# Altium PCB PCB1.PcbDoc
Units mil, origin at the board's own origin, x right, y up, seen from the top; angles counter-clockwise.
Board outline 6150 x 5015 mil, 2 copper layers (Top Layer, Bottom Layer); 46 components, 60 nets, 245 pads, 29 vias.
Unrouted connection lines stored in the file: 1.
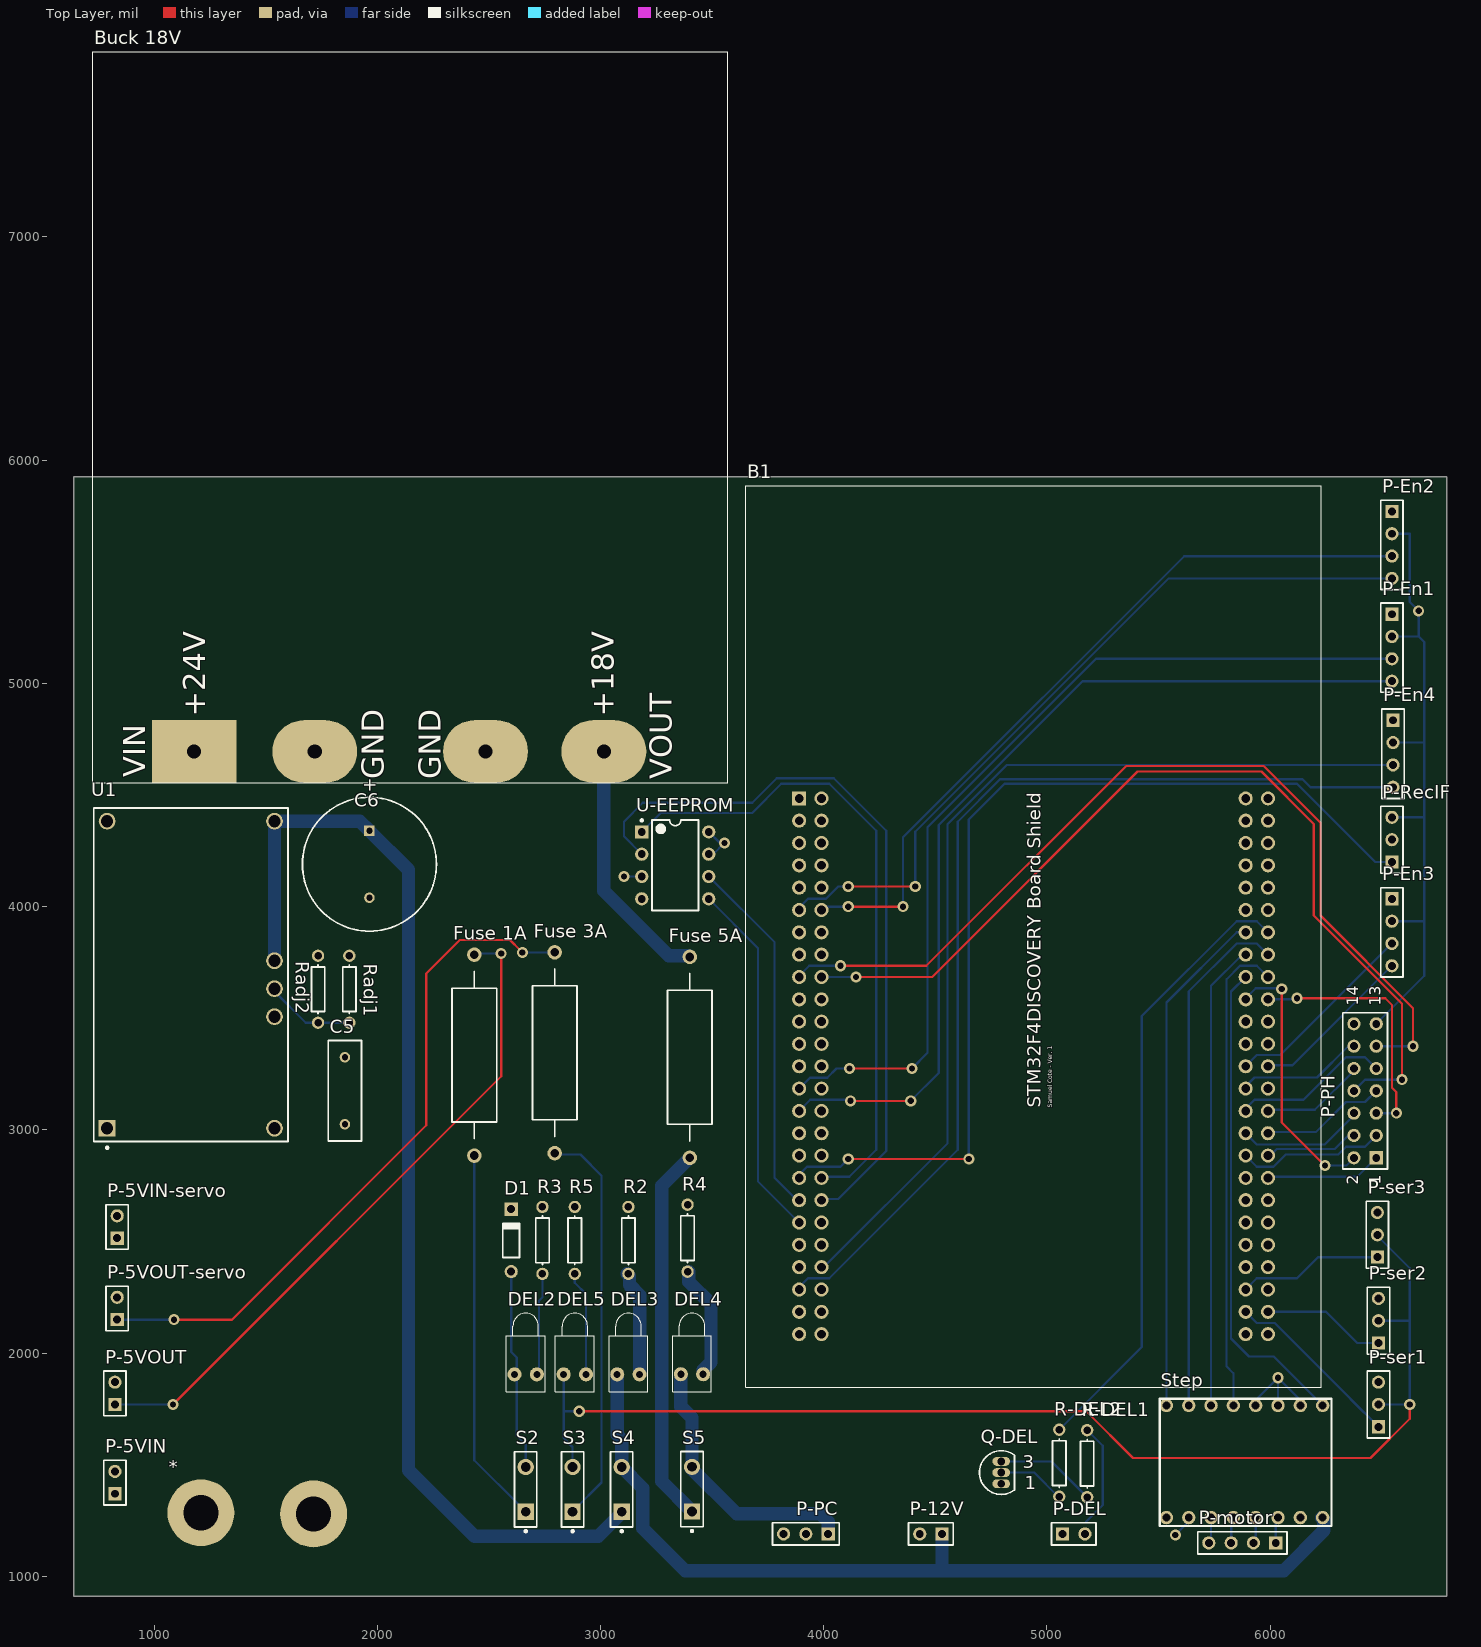
[diagram p0: Top Layer view]
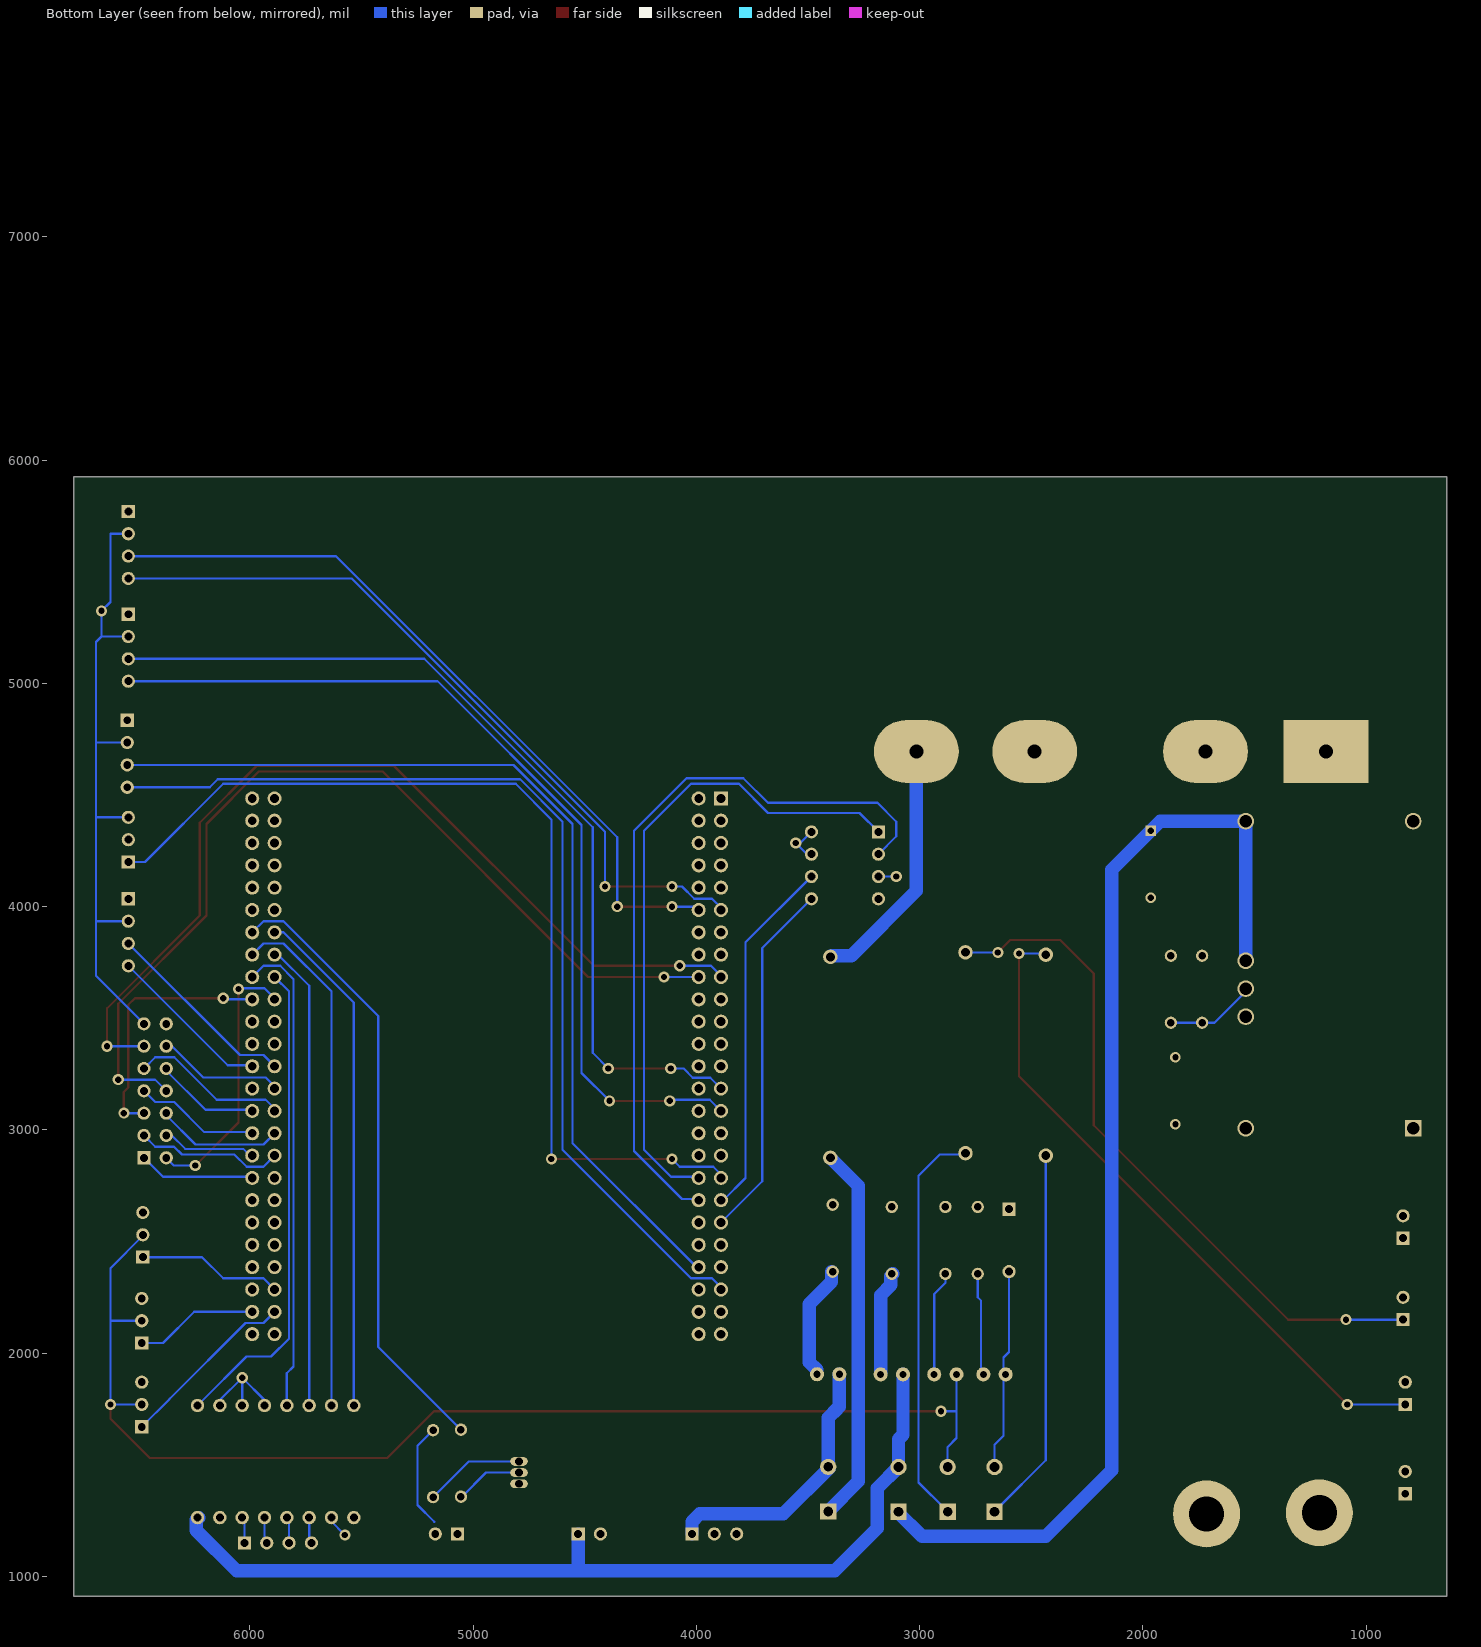
[diagram p1: Bottom Layer view, seen from below]

## Layer stack, top to bottom
Top Solder: solder mask 0.4, Solder Resist, Dk 3.5
Top Layer: signal copper 1.4
Dielectric 1: dielectric 12.6, FR-4, Dk 4.8
Bottom Layer: signal copper 1.4
Bottom Solder: solder mask 0.4, Solder Resist, Dk 3.5

## Board outline
640,910 6790,910 6790,5925 640,5925

## Design rules (kind name [scope] priority, off if disabled: settings)
Clearance [All] p1: gap=10
PolygonConnect [All] p1: connectstyle=Relief reliefconductorwidth=10 reliefentries=4 polygonreliefangle="90 Angle" airgapwidth=10
RoutingVias [All] p1: holewidth=28 width=50 viastyle="Through Hole" minholewidth=28 minwidth=50 maxholewidth=28 maxwidth=50
SolderMaskExpansion [All] p1: expansion=4
Width [All] p1: maxlimit=60 minlimit=10 preferedwidth=10 minimp=50.000000 maximp=50.000000 favimp=50.000000
30 further rules are at their usual default settings.

## Components (designator, comment, footprint, x,y, rotation, side; value= is the part's Value field where it differs from the comment)
* "BAT" BAT 1210,1284.53 r0 top
B1 "STM32F4" "STM32F4DISCOVERY Board Shield" 3890,4484.53 r0 top
"Buck 18V" "Buck 18V D3 v2" "Buck 18V D3" 1180,4694.53 r90 top
C5 "Cap" RAD-0.3 1855,3175 r90 top
C6 "Cap Pol1" RB7.6-15 1965,4189.53 r90 top
D1 "Diode 1N4148" DO-35 2600,2504.53 r90 top
DEL2 "5V" LED-1 2665,1904.53 r90 top
DEL3 "Reg12V" LED-1 3125,1904.53 r90 top
DEL4 "18V" LED-1 3410,1905 r90 top
DEL5 "5V" LED-1 2885,1904.53 r90 top
"Fuse 1A" "Fuse 5A" AXIAL-0.9 2435,3334.53 r270 top
"Fuse 3A" "Fuse 8A" AXIAL-0.9 2795,3345 r270 top
"Fuse 5A" "Fuse 8A" AXIAL-0.9 3400,3324.53 r270 top
P-5VIN "Header 2" HDR1X2 825,1369.53 r90 top
P-5VIN-servo "Header 2" HDR1X2 835,2514.53 r90 top
P-5VOUT "Header 2" HDR1X2 825,1769.53 r90 top
P-5VOUT-servo "Header 2" HDR1X2 835,2149.53 r90 top
P-12V "Header 2" HDR1X2 4530,1189.53 r180 top
P-DEL "Header 2" HDR1X2 5070,1189.53 r0 top
P-En1 "Header 4" HDR1X4 6545,5309.53 r270 top
P-En2 "Header 4" HDR1X4 6545,5770 r270 top
P-En3 "Header 4" HDR1X4 6545,4034.53 r270 top
P-En4 "Header 4" HDR1X4 6550,4834.53 r270 top
P-motor "Header 4" HDR1X4 6025,1149.53 r180 top
P-PC "Header 3" HDR1X3 4020,1189.53 r180 top
P-PH "Header 7X2" HDR2X7 6475,2874.53 r90 top
P-RecIF "Header 3" HDR1X3 6545,4199.53 r90 top
P-ser1 "Header 3" HDR1X3 6485,1669.53 r90 top
P-ser2 "Header 3" HDR1X3 6485,2044.53 r90 top
P-ser3 "Header 3" HDR1X3 6480,2429.53 r90 top
Q-DEL "2N3904" TO-92A 4795,1464.53 r0 top
R2 "Res1" AXIAL-0.3 3125,2504.53 r90 top
R3 "Res1" AXIAL-0.3 2740,2504.53 r270 top
R4 "Res1" AXIAL-0.3 3390,2514.53 r270 top
R5 "Res1" AXIAL-0.3 2885,2504.53 r90 top
R-DEL1 "Res1" AXIAL-0.3 5180,1504.53 r90 top
R-DEL2 "Res1" AXIAL-0.3 5055,1506.64 r90 top
Radj1 "Res1" AXIAL-0.3 1875,3629.53 r90 top
Radj2 "Res1" AXIAL-0.3 1735,3629.53 r90 top
S2 "SW-SPST" SPST-2 2665,1389.53 r90 top
S3 "SW-SPST" SPST-2 2875,1389.53 r90 top
S4 "SW-SPST" SPST-2 3095,1389.53 r90 top
S5 "SW-SPST" SPST-2 3410,1390 r90 top
Step "Stepper" stepper 6235,1765 r270 top
U1 "PTN78020WAH" TI-EUK7_V 1165,3694.53 r90 top
U-EEPROM "JL411BPA" J08A 3335,4184.53 r0 top

## Footprints (in the part's own frame and the unit in brackets; to place one, negate y for a bottom-side part, rotate by r counter-clockwise, add the part's x,y. Pads: shape width x height; smd on the part's side, far side on the other; paste and mask are expansions set on the pad)
AXIAL-0.3 [mm] "Axial Device, Thru-Hole; 2 Leads; 0.3 in Pin Spacing"
  round 1.4 hole 0.85: 1(-3.81,0) 2(3.81,0)
  silkscreen extent -2.77,-0.76 2.77,0.76
AXIAL-0.9 [mm] "Axial Device, Thru-Hole; 2 Leads; 0.9 in Pin Spacing"
  round 1.65 hole 1: 1(-11.43,0) 2(11.43,0)
  silkscreen extent -9.53,-2.54 9.53,2.54
BAT [mil]
  round 300 hole 157: 1(0,0) 2(505,-5)
"Buck 18V D3" [mil] "Buck 18V D3"
  rect 280x380 hole 63: 1(0,0)
  oval 280x380 hole 63: 2(0,-540) 3(0,-1305) 4(0,-1835)
  silkscreen extent -140,-2390 3135,455, body extent -140,-2390 3135,455, height 525
DO-35 [mm] "Diode, Axial; Body 3.8 x 1.9 mm (LxDia. max), Lead Dia. 0.53 mm (max)"
  round 1.5 hole 0.9: 1(-3.55,0)
  rect 1.5x1.5 hole 0.9: 2(3.55,0)
  silkscreen extent -1.95,-0.95 2.05,0.95
HDR1X2 [mm] "Connector; Header; 2 Position"
  rect 1.5x1.5 hole 0.9: 1(0,0)
  round 1.5 hole 0.9: 2(2.54,0)
  silkscreen extent -1.27,-1.27 3.81,1.27
HDR1X3 [mm] "Connector; Header; 3 Position"
  rect 1.5x1.5 hole 0.9: 1(0,0)
  round 1.5 hole 0.9: 2(2.54,0) 3(5.08,0)
  silkscreen extent -1.27,-1.27 6.35,1.27
HDR1X4 [mm] "Connector; Header; 4 Position"
  rect 1.5x1.5 hole 0.9: 1(0,0)
  round 1.5 hole 0.9: 2(2.54,0) 3(5.08,0) 4(7.62,0)
  silkscreen extent -1.27,-1.27 8.89,1.27
HDR2X7 [mm] "Connector; Header; 7x2 Position"
  rect 1.5x1.5 hole 0.9: 1(0,0)
  round 1.5 hole 0.9: 2(0,2.54) 3(2.54,0) 4(2.54,2.54) 5(5.08,0) 6(5.08,2.54) 7(7.62,0) 8(7.62,2.54) 9(10.16,0) 10(10.16,2.54) 11(12.7,0) 12(12.7,2.54) 13(15.24,0) 14(15.24,2.54)
  silkscreen extent -1.27,-1.27 16.51,3.81
J08A [mm] "DIP, 8-Leads, Row Spacing 7.62mm, Pitch 2.54mm, Body 9.78x6.73mm"
  rect 1.5x1.5 hole 0.9: 1(-3.81,3.81)
  round 1.5 hole 0.9: 2(-3.81,1.27) 3(-3.81,-1.27) 4(-3.81,-3.81) 5(3.81,-3.81) 6(3.81,-1.27) 7(3.81,1.27) 8(3.81,3.81)
  silkscreen extent -3.93,-5.15 2.65,5.23, body extent -3.6,-5.15 3.6,5.15, height 5.08
LED-1 [mm] "LED; 2 Leads"
  round 1.6 hole 0.8: 1(0,1.27) 2(0,-1.27)
  silkscreen extent -2,-2.2 6.95,2.2
RAD-0.3 [mm] "Radial Cap, Thru-Hole; 2 Leads; 0.3 in Pin Spacing"
  round 1.2 hole 0.7: 1(-3.81,0) 2(3.81,0)
  silkscreen extent -5.71,-1.91 5.71,1.91
RB7.6-15 [mm] "Polarized Capacitor (Radial); 2 Leads"
  rect 1.2x1.2 hole 0.7: 1(3.81,0)
  round 1.2 hole 0.7: 2(-3.81,0)
  silkscreen extent -7.62,-7.62 7.62,7.62
SPST-2 [mm] "Switch; 2 Leads"
  rect 1.85x1.85 hole 1.1: 1(-2.54,0)
  round 1.85 hole 1.1: 2(2.54,0)
  silkscreen extent -4.89,-1.27 4.28,1.27
stepper [mil]
  round 60 hole 35.43: 1(0,0) 2(0,-100) 3(0,-200) 4(0,-300) 5(0,-400) 6(0,-500) 7(0,-600) 8(0,-700) 9(502,0) 10(502,-100) 11(502,-200) 12(502,-300) 13(502,-400) 14(502,-500) 15(502,-600) 16(502,-700)
  silkscreen extent -30,-730 540,40
"STM32F4DISCOVERY Board Shield" [mm]
  rect 1.6x1.6 hole 1: 1(0,0)
  round 1.6 hole 1: 2(2.54,0) 3(0,-2.54) 4(2.54,-2.54) 5(0,-5.08) 6(2.54,-5.08) 7(0,-7.62) 8(2.54,-7.62) 9(0,-10.16) 10(2.54,-10.16) 11(0,-12.7) 12(2.54,-12.7) 13(0,-15.24) 14(2.54,-15.24) 15(0,-17.78) 16(2.54,-17.78) 17(0,-20.32) 18(2.54,-20.32) 19(0,-22.86) 20(2.54,-22.86) 21(0,-25.4) 22(2.54,-25.4) 23(0,-27.94) 24(2.54,-27.94) 25(0,-30.48) 26(2.54,-30.48) 27(0,-33.02) 28(2.54,-33.02) 29(0,-35.56) 30(2.54,-35.56) 31(0,-38.1) 32(2.54,-38.1) 33(0,-40.64) 34(2.54,-40.64) 35(0,-43.18) 36(2.54,-43.18) 37(0,-45.72) 38(2.54,-45.72) 39(0,-48.26) 40(2.54,-48.26) 41(0,-50.8) 42(2.54,-50.8) 43(0,-53.34) 44(2.54,-53.34) 45(0,-55.88) 46(2.54,-55.88) 47(0,-58.42) 48(2.54,-58.42) 49(0,-60.96) 50(2.54,-60.96) 51(50.8,0) 52(53.34,0) 53(50.8,-2.54) 54(53.34,-2.54) 55(50.8,-5.08) 56(53.34,-5.08) 57(50.8,-7.62) 58(53.34,-7.62) 59(50.8,-10.16) 60(53.34,-10.16) 61(50.8,-12.7) 62(53.34,-12.7) 63(50.8,-15.24) 64(53.34,-15.24) 65(50.8,-17.78) 66(53.34,-17.78) 67(50.8,-20.32) 68(53.34,-20.32) 69(50.8,-22.86) 70(53.34,-22.86) 71(50.8,-25.4) 72(53.34,-25.4) 73(50.8,-27.94) 74(53.34,-27.94) 75(50.8,-30.48) 76(53.34,-30.48) 77(50.8,-33.02) 78(53.34,-33.02) 79(50.8,-35.56) 80(53.34,-35.56) 81(50.8,-38.1) 82(53.34,-38.1) 83(50.8,-40.64) 84(53.34,-40.64) 85(50.8,-43.18) 86(53.34,-43.18) 87(50.8,-45.72) 88(53.34,-45.72) 89(50.8,-48.26) 90(53.34,-48.26) 91(50.8,-50.8) 92(53.34,-50.8) 93(50.8,-53.34) 94(53.34,-53.34) 95(50.8,-55.88) 96(53.34,-55.88) 97(50.8,-58.42) 98(53.34,-58.42) 99(50.8,-60.96) 100(53.34,-60.96)
  silkscreen extent -6.1,-67 59.42,35.59, body extent -6.09,-66.99 59.41,35.58, height 27.2
TI-EUK7_V [mm] "Module, 7-Leads, Body 37.97x22.1mm"
  rect 1.9x1.9 hole 1.4: 1(-17.465,9.53)
  round 1.9 hole 1.4: 2(-17.465,-9.52) 3(-4.765,-9.52) 4(-1.585,-9.52) 5(1.595,-9.52) 6(17.475,-9.52) 7(17.475,9.53)
  silkscreen extent -19.81,-11.05 18.98,11.05, body extent -18.98,-11.05 18.98,11.05, height 9
TO-92A [mm] "TO, Flat Index; 3 In-Line, Axial Leads; Body Dia. 4.5mm; Leads 0.51 x 0.48 mm (max)"
  oval 2x1 hole 0.9: 1(0,-1.27) 2(0,0) 3(0,1.27)
  silkscreen extent -2.48,-2.48 1.5,2.48

## Part data
B1: library part "STM32F4DISCOVERY Board Shield", "STM32F4DISCOVERY Board Shield"
C5: "Capacitor"
C6: "Polarized Capacitor (Radial)"
D1: "High Conductance Fast Diode"
DEL2 DEL3 DEL4 DEL5: library part LED0, "Typical INFRARED GaAs LED"
"Fuse 1A" "Fuse 3A" "Fuse 5A": library part "Fuse 1", "Fuse"
P-5VIN P-5VIN-servo P-5VOUT P-5VOUT-servo P-12V P-DEL: "Header, 2-Pin"
P-En1 P-En2 P-En3 P-En4 P-motor: "Header, 4-Pin"
P-PC P-RecIF P-ser1 P-ser2 P-ser3: "Header, 3-Pin"
P-PH: "Header, 7-Pin, Dual row"
Q-DEL: "NPN General Purpose Amplifier"
R2 R3 R4 R5 R-DEL1 R-DEL2 Radj1 Radj2: "Resistor"
S2 S3 S4 S5: "Single-Pole, Single-Throw Switch"
U1: "6 A Wide-Input Voltage Adjustable Switching Regulator, -40 to 85 degC, 7-pin Module (EUK7), Pb-Free (RoHS)"
U-EEPROM: "Low Offset, Low Drift JFET Input Operational Amplifier"

## Via types
v1: diameter 50, hole 28, Top Layer to Bottom Layer, 29 vias

## Nets (pads, with @x,y where several pads share a name; then routed paths per layer and width w, separated by ;. In a path a pad name is that pad's centre, name@x,y a point inside that pad or via, vN(x,y) a via of type N, cw(c..) or ccw(c..) an arc to the next point about the centre after c; other vN are vias at no path point)
GND: "Buck 18V.2" "Buck 18V.3" *.2 B1.1 B1.2 B1.49 B1.50 B1.51 B1.52 B1.99 B1.100 C5.1 C6.2 P-5VIN-servo.2 P-5VIN.2 P-5VOUT-servo.2 P-5VOUT.2 P-12V.2 P-En1.1 P-En2.1 P-En3.1 P-En4.1 P-PC.3 P-PH.14 P-RecIF.2 P-ser1.3 P-ser2.3 P-ser3.3 Q-DEL.1 R2.2 R3.1 R4.1 R5.2 Radj1.2 Radj2.2 Step.10 Step.16 U1.1 U1.7 U-EEPROM.4
Net*_1: "Buck 18V.1" *.1 C5.2 P-5VIN-servo.1 P-5VIN.1 U1.2
"NetBuck 18V_4": "Buck 18V.4" "Fuse 5A.1" | length 1124.8
  Bottom Layer w60: 3015,4694.53 3015,4070 3305.47,3779.53 3395,3779.53
NetC6_1: C6.1 S4.1 U1.5 U1.6 | length 5125.5
  Bottom Layer w60: U1.5 1539.8,3869.53 ; 1539.8,3874.33 U1.6 1922.01,4382.52 C6.1@1962.99,4341.54 ; C6.1 2140,4164.53 2140,1475 2435.47,1179.53 2990,1179.53 S4.1@3100,1289.53
NetD1_1: D1.1 DEL2.1 S2.2 | length 882.2
  Bottom Layer w10: D1.1 2600,2004.53 2625,1979.53 2625,1904.53 2625,1629.53 2665,1589.53 S2.2@2665,1509.53
NetDEL2_2: DEL2.2 R3.2 | length 451.2
  Bottom Layer w10: DEL2.2@2725,1904.53 2725,2234.53 2740,2249.53 R3.2@2740,2349.53
NetDEL3_2: DEL3.2 R2.1 | length 462.8
  Bottom Layer w60: R2.1@3120,2354.53 3130,2344.53 3130,2304.53 3175,2259.53 DEL3.2@3175,1914.53
NetDEL4_1: DEL4.1 P-PC.1 S5.2 | length 1200.6
  Bottom Layer w40: S5.2@3405,1485 S5.2
  Bottom Layer w60: 3360,1760 DEL4.1 ; 3368.5,1751.5 3410,1710 S5.2 ; S5.2@3405,1485 3610.47,1279.53 3985.47,1279.53 4020,1245 P-PC.1
NetDEL4_2: DEL4.2 R4.2 | length 515.4
  Bottom Layer w10: DEL4.2 DEL4.2@3460,1924.53
  Bottom Layer w60: R4.2@3395,2364.53 3395,2319.53 3495,2219.53 3495,1959.53 DEL4.2@3460,1924.53
NetDEL5_2: DEL5.2 R5.1 | length 470.7
  Bottom Layer w10: R5.1 2885,2314.53 2935,2264.53 DEL5.2
"NetFuse 1A_1": "Fuse 1A.1" P-5VOUT.1 | length 2993.9
  Top Layer w10: v1(1085,1769.53) 2555,3239.53 v1@2555,3774.53
  Bottom Layer w10: P-5VOUT.1 v1(1085,1769.53) ; 2435,3789.53 v1(2555,3789.53)
"NetFuse 1A_2": "Fuse 1A.2" S2.1 | length 1710.3
  Bottom Layer w10: 2435,2884.53 2435,1520 2645,1310 2645,1289.53 S2.1@2665,1309.53
"NetFuse 3A_1": "Fuse 3A.1" P-5VOUT-servo.1 | length 3056.5
  Top Layer w10: v1(1090,2149.53) 1349.53,2149.53 2220,3020 2220,3700 2370,3850 2594.53,3850 v1@2640,3804.53
  Bottom Layer w10: P-5VOUT-servo.1 v1(1090,2149.53) ; v1(2650,3794.53) 2780,3794.53
"NetFuse 3A_2": "Fuse 3A.2" S3.1 | length 1828.2
  Bottom Layer w10: 2785,2889.53 2910,2889.53 3005,2794.53 3005,1420 2885,1300 2885,1289.53 S3.1@2875,1299.53
"NetFuse 5A_2": "Fuse 5A.2" S5.1 | length 1692.2
  Bottom Layer w60: 3400,2874.53 3275,2749.53 3275,1425 S5.1
NetP-DEL_2: P-DEL.2 R-DEL1.2 | length 470.1
  Bottom Layer w10: 5175,1244.53 5250,1319.53 5250,1584.53 R-DEL1.2
NetP-motor_1: P-motor.1 Step.11 | length 118
  Bottom Layer w10: P-motor.1 Step.11@6025,1267.53
NetP-motor_2: P-motor.2 Step.12 | length 132.1
  Bottom Layer w10: P-motor.2 5935,1159.53 Step.12@5935,1277.53
NetP-motor_3: P-motor.3 Step.13 | length 118
  Bottom Layer w10: P-motor.3 Step.13@5825,1267.53
NetP-motor_4: P-motor.4 Step.14 | length 132.1
  Bottom Layer w10: P-motor.4 5735,1159.53 Step.14@5735,1277.53
NetQ-DEL_2: Q-DEL.2 R-DEL2.1 | length 303.4
  Bottom Layer w10: Q-DEL.2 4942.88,1464.53 R-DEL2.1@5052.88,1354.53
NetQ-DEL_3: Q-DEL.3 R-DEL1.1 | length 437.1
  Bottom Layer w10: Q-DEL.3 5020,1514.53 R-DEL1.1@5170,1364.53
NetRadj1_1: Radj1.1 Radj2.1 U1.4 | length 405.7
  Bottom Layer w10: U1.4 1539.8,3619.72 1680,3479.53 Radj2.1 Radj1.1
PA0: B1.12 P-En2.3 | length 3387.2
  Top Layer w10: v1(4110,3999.53) v1(4355,3999.53)
  Bottom Layer w10: B1.12@3995,3999.53 v1(4110,3999.53) ; v1(4355,3999.53) 4355,4310 5614.53,5569.53 P-En2.3@6550,5569.53
PA1: B1.11 P-En2.4 | length 3417
  Top Layer w10: v1(4110,4089.53) v1(4410,4089.53)
  Bottom Layer w10: B1.11@3885,3989.53 3930,4034.53 4010,4034.53 4065,4089.53 v1(4110,4089.53) ; v1(4410,4089.53) 4410,4335 5545,5470 P-En2.4
PA6: B1.18 P-PH.8 | length 4235.1
  Top Layer w10: v1(4145,3684.53) 4485.59,3684.53 5405.59,4604.53 5960.47,4604.53 6195,4370 6195,3959.53 6590,3564.53 v1(6590,3224.53)
  Bottom Layer w10: B1.18@3985,3689.53 B1.18 v1(4145,3684.53) ; P-PH.8 6425,3224.53 v1(6590,3224.53)
PA7: B1.17 P-PH.11 | length 4180.2
  Top Layer w10: v1(4075,3734.53) 4459.53,3734.53 5354.53,4629.53 5970.47,4629.53 6225,4375 6225,3960 6640,3545 v1(6640,3374.53)
  Bottom Layer w10: B1.17 3890,3689.53 3935,3734.53 v1(4075,3734.53) ; B1.17@3909.24,3689.53 B1.17@3912.24,3689.53 ; P-PH.11@6475,3379.53 P-PH.11 v1(6640,3374.53)
PB4: B1.75 P-En3.3 | length 882.8
  Bottom Layer w10: B1.75 5940,3334.53 6045,3334.53 P-En3.3
PB5: B1.76 P-En3.4 | length 744.3
  Bottom Layer w10: B1.76@5985,3289.53 6100,3289.53 P-En3.4
PB8: B1.69 P-PH.2 | length 1202.7
  Top Layer w10: v1(6051.5,3631.02) 6051.5,3033.03 v1(6245,2839.53)
  Bottom Layer w10: B1.69 5890,3589.53 5935,3634.53 6047.99,3634.53 v1(6051.5,3631.02) ; v1(6245,2839.53) 6340,2839.53 P-PH.2
PB9: B1.70 P-PH.5 | length 1124.9
  Top Layer w10: v1(6120,3589.53) 6515,3589.53 6545,3559.53 6545,3189.53 6565,3169.53 v1(6565,3074.53)
  Bottom Layer w10: B1.70@5985,3589.53 B1.70 6105,3584.53 v1@6110,3589.53 ; P-PH.5 v1@6540,3074.53
PB11: B1.35 P-RecIF.1 | length 4428
  Top Layer w10: v1(4110,2869.53) v1(4650,2869.53)
  Bottom Layer w10: B1.35@3885,2789.53 3885,2794.53 3925,2834.53 4075,2834.53 v1(4110,2869.53) ; v1(4650,2869.53) 4650,4390 4810,4550 6120,4550 6470.47,4199.53 P-RecIF.1
PB12: B1.36 U-EEPROM.1 | length 2956.1
  Bottom Layer w10: U-EEPROM.1 3270,4419.53 3679.53,4419.53 3810,4550 4025,4550 4235,4340 4235,2910 4114.53,2789.53 B1.36@3985,2789.53
PB13: B1.37 U-EEPROM.6 | length 1613.6
  Bottom Layer w10: U-EEPROM.6 3780,3839.53 3780,2784.53 B1.37@3880,2684.53
PB14: B1.38 U-EEPROM.2 | length 3351
  Bottom Layer w10: U-EEPROM.2 3105,4314.53 3105,4380 3189.53,4464.53 3679.53,4464.53 3790,4575 4045,4575 4280,4340 4280,2905 4064.53,2689.53 B1.38@3985,2689.53
PB15: B1.39 U-EEPROM.5 | length 1596.5
  Bottom Layer w10: U-EEPROM.5 3705,3814.53 3705,2769.53 B1.39@3875,2599.53
PC6: B1.97 P-ser1.1 | length 818.6
  Bottom Layer w10: B1.97@5890,2194.53 B1.97 5940,2134.53 6020.47,2134.53 6360,1795 6360,1794.53 P-ser1.1
PC7: B1.98 P-ser2.1 | length 553
  Bottom Layer w10: B1.98 6250,2184.53 6390,2044.53 P-ser2.1
PC8: B1.95 P-ser3.1 | length 650.1
  Bottom Layer w10: B1.95 5940,2334.53 6119.53,2334.53 6214.53,2429.53 P-ser3.1
PD0: B1.86 P-PH.1 | length 525.2
  Bottom Layer w10: B1.86@5985,2789.53 6390,2789.53 P-PH.1
PD1: B1.83 P-PH.3 | length 670.8
  Bottom Layer w10: B1.83@5885,2889.53 B1.83 5940,2834.53 6015,2834.53 6070,2889.53 6305,2889.53 6340,2924.53 6425,2924.53 P-PH.3
PD2: B1.84 P-PH.4 | length 425.2
  Bottom Layer w10: B1.84@5985,2889.53 6005,2889.53 6030,2914.53 6290,2914.53 6350,2974.53 P-PH.4
PD3: B1.81 P-PH.6 | length 576.4
  Bottom Layer w10: B1.81@5885,2989.53 5940,2934.53 6244.53,2934.53 6375,3065 P-PH.6
PD4: B1.82 P-PH.7 | length 560.8
  Bottom Layer w10: B1.82@5995,2999.53 6005,2989.53 6204.53,2989.53 6339.53,3124.53 6425,3124.53 P-PH.7
PD5: B1.79 P-PH.9 | length 708.1
  Bottom Layer w10: B1.79@5885,3089.53 5930,3134.53 6149.53,3134.53 6339.53,3324.53 6425,3324.53 P-PH.9
PD6: B1.80 P-PH.10 | length 472.2
  Bottom Layer w10: B1.80@5985,3089.53 6199.53,3089.53 6375,3265 P-PH.10
PD7: B1.77 P-PH.12 | length 566.6
  Bottom Layer w10: B1.77@5885,3189.53 5930,3234.53 6209.53,3234.53 6349.53,3374.53 P-PH.12
PD12: B1.44 P-En4.3 | length 4332.6
  Bottom Layer w10: B1.44@3985,2389.53 4004.53,2389.53 4555,2940 4555,4370 4819.53,4634.53 P-En4.3
PD13: B1.45 P-En4.4 | length 4485.4
  Bottom Layer w10: B1.45@3885,2289.53 3930,2334.53 4024.53,2334.53 4600,2910 4600,4380 4790,4570 6145,4570 6180.47,4534.53 P-En4.4
PE0: B1.67 Step.1 | length 2174.9
  Bottom Layer w10: B1.67 5824.71,3619.23 5824.71,2065.29 5905.47,1984.53 6015.47,1984.53 6220.47,1779.53 Step.1@6235,1779.53
PE1: B1.68 Step.5 | length 2138.5
  Bottom Layer w10: Step.5@5835,1779.53 5835,1909.71 5804.71,1940 5804.71,3674.71 5864.53,3734.53 5940,3734.53 B1.68
PE2: B1.65 Step.6 | length 2078.3
  Bottom Layer w10: Step.6@5735,1779.53 5735,3645 5874.53,3784.53 B1.65
PE3: B1.66 Step.7 | length 2305
  Bottom Layer w10: Step.7@5635,1779.53 5635,3620 5849.53,3834.53 5940,3834.53 B1.66
PE4: B1.63 Step.8 | length 2275.8
  Bottom Layer w10: Step.8@5535,1779.53 5535,3570 5849.53,3884.53 B1.63
PE5: B1.64 R-DEL2.2 | length 2768.2
  Bottom Layer w10: R-DEL2.2 5425,2026.64 5425,3510 5849.53,3934.53 5940,3934.53 B1.64
PE9: B1.27 P-En1.3 | length 4044.3
  Top Layer w10: v1(4115,3274.53) v1(4395,3274.53)
  Bottom Layer w10: B1.27 3938.81,3233.34 4016.19,3233.34 4057.38,3274.53 v1(4115,3274.53) ; v1(4395,3274.53) 4465,3344.53 4465,4355 5219.53,5109.53 P-En1.3
PE11: B1.29 P-En1.4 | length 4099.9
  Top Layer w10: v1(4120,3129.53) v1(4390,3129.53)
  Bottom Layer w10: B1.29 3940,3134.53 v1@4115,3134.53 ; v1(4390,3129.53) 4515,3254.53 4515,4365 5159.53,5009.53 P-En1.4
V5VSERVO: DEL5.1 P-ser1.2 P-ser2.2 P-ser3.2 S3.2 | length 5489.5
  Top Layer w10: v1(2905,1739.53) 5175.47,1739.53 5385.47,1529.53 6449.53,1529.53 6625,1705 v1(6625,1769.53)
  Bottom Layer w10: DEL5.1 2835,1739.53 ; S3.2@2875,1499.53 2875,1579.53 2835,1619.53 2835,1739.53 ; v1(2905,1739.53) 2835,1739.53 ; P-ser3.2@6477.74,2527.26 6625,2380 6625,2144.53 ; P-ser2.2@6505,2144.53 6625,2144.53 ; P-ser1.2@6510,1769.53 v1(6625,1769.53) 6625,2144.53
V5VSTM: B1.53 B1.54 D1.2 P-DEL.1 P-En1.2 P-En2.2 P-En3.2 P-En4.2 P-PH.13 P-RecIF.3 Step.2 Step.3 Step.4 Step.15 U-EEPROM.3 U-EEPROM.7 U-EEPROM.8 | length 3690.9
  Bottom Layer w10: v1(3105,4134.53) U-EEPROM.3 ; U-EEPROM.7 3505,4234.53 v1(3555,4284.53) ; U-EEPROM.8 v1@3535,4284.53 ; v1(5575,1185) 5640.85,1250.85 Step.15@5640.85,1263.4 ; Step.4@5935,1789.53 v1(6035,1889.53) ; Step.3 v1(6035,1889.53) ; Step.2@6135,1789.53 v1(6035,1889.53) ; P-PH.13 6690,3689.53 6690,3934.53 ; P-En3.2 6690,3934.53 ; P-RecIF.3 6690,4399.53 ; P-En1.2 6665,5209.53 ; P-En4.2 6690,4734.53 ; P-En2.2@6550,5670 6625,5670 6625,5364.53 v1(6665,5324.53) 6665,5209.53 ; 6665,5209.53 6690,5184.53 6690,4734.53 ; 6690,3934.53 6690,4399.53 ; 6690,4399.53 6690,4734.53
V12V: DEL3.1 P-12V.1 S4.2 Step.9 | length 4166.6
  Bottom Layer w60: DEL3.1 3075,1634.53 3095,1614.53 S4.2 3190,1394.53 3190,1215 3380,1025 4530,1025 ; P-12V.1 4530,1025 ; Step.9@6230,1262.53 6240,1252.53 6240,1205 6060,1025 4530,1025
pads on no net: B1.3 B1.4 B1.5 B1.6 B1.7 B1.8 B1.9 B1.10 B1.13 B1.14 B1.15 B1.16 B1.19 B1.20 B1.21 B1.22 B1.23 B1.24 B1.25 B1.26 B1.28 B1.30 B1.31 B1.32 B1.33 B1.34 B1.40 B1.41 B1.42 B1.43 B1.46 B1.47 B1.48 B1.55 B1.56 B1.57 B1.58 B1.59 B1.60 B1.61 B1.62 B1.71 B1.72 B1.73 B1.74 B1.78 B1.85 B1.87 B1.88 B1.89 B1.90 B1.91 B1.92 B1.93 B1.94 B1.96 P-PC.2 U1.3

## Text inside footprints (layer, text, board x,y; h text height)
B1: Top Overlay "STM32F4DISCOVERY Board Shield" at 4971.5,3098.7 h60 r90; Top Overlay "Samuel Cote - Ver. 1" at 5023.07,3098.31 h19.68 r90
"Buck 18V": Top Overlay "VIN" at 960,4579.53 h100 r90; Top Overlay "+24V" at 1230,4849.53 h100 r90; Top Overlay "+18V" at 3060,4849.53 h100 r90; Top Overlay "VOUT" at 3320,4569.53 h100 r90; Top Overlay "GND" at 2285,4569.53 h100 r90; Top Overlay "GND" at 2030,4569.53 h100 r90
C6: Top Overlay "+" at 1994.01,4509.68 h59.06 r90
P-PH: Top Overlay "13" at 6495,3554.53 h50 r90; Top Overlay "14" at 6395,3554.53 h50 r90; Top Overlay "1" at 6495,2754.53 h50 r90; Top Overlay "2" at 6395,2754.53 h50 r90
Q-DEL: Top Overlay "1" at 4899.72,1389.72 h59.05; Top Overlay "3" at 4890.67,1484.61 h59.05